# EAGLE board board (EAGLE 6.5.0)
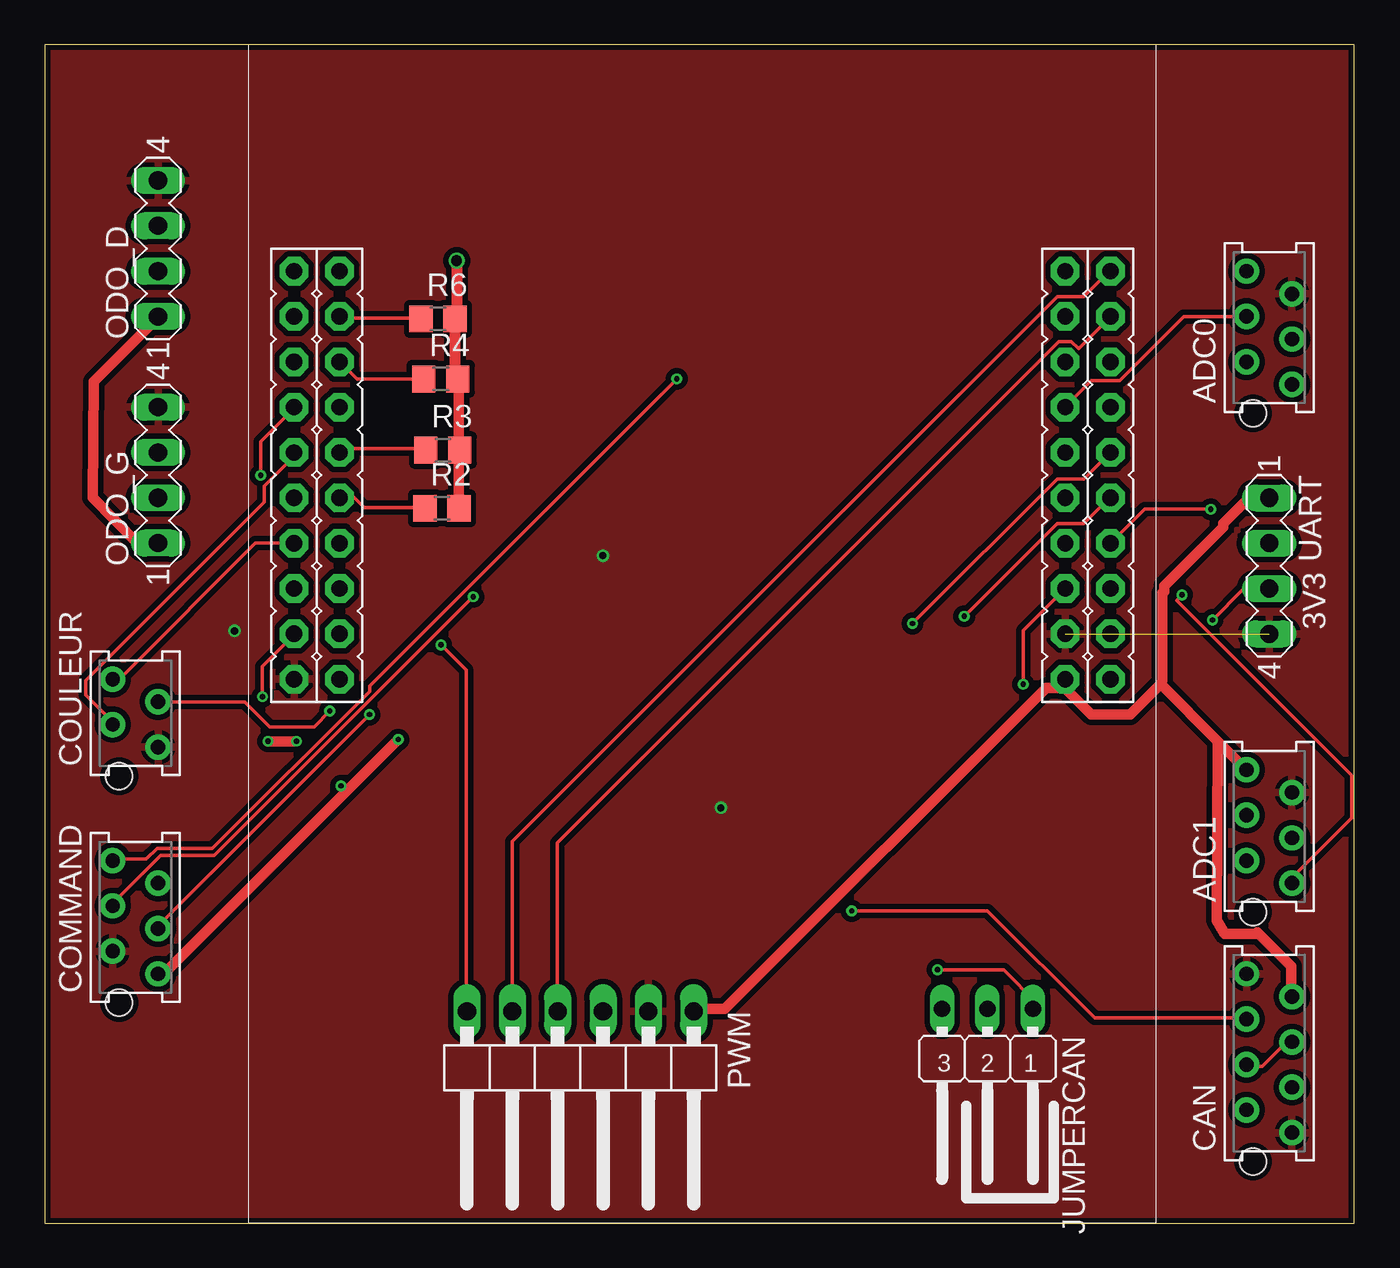
[diagram p0: board, top side]
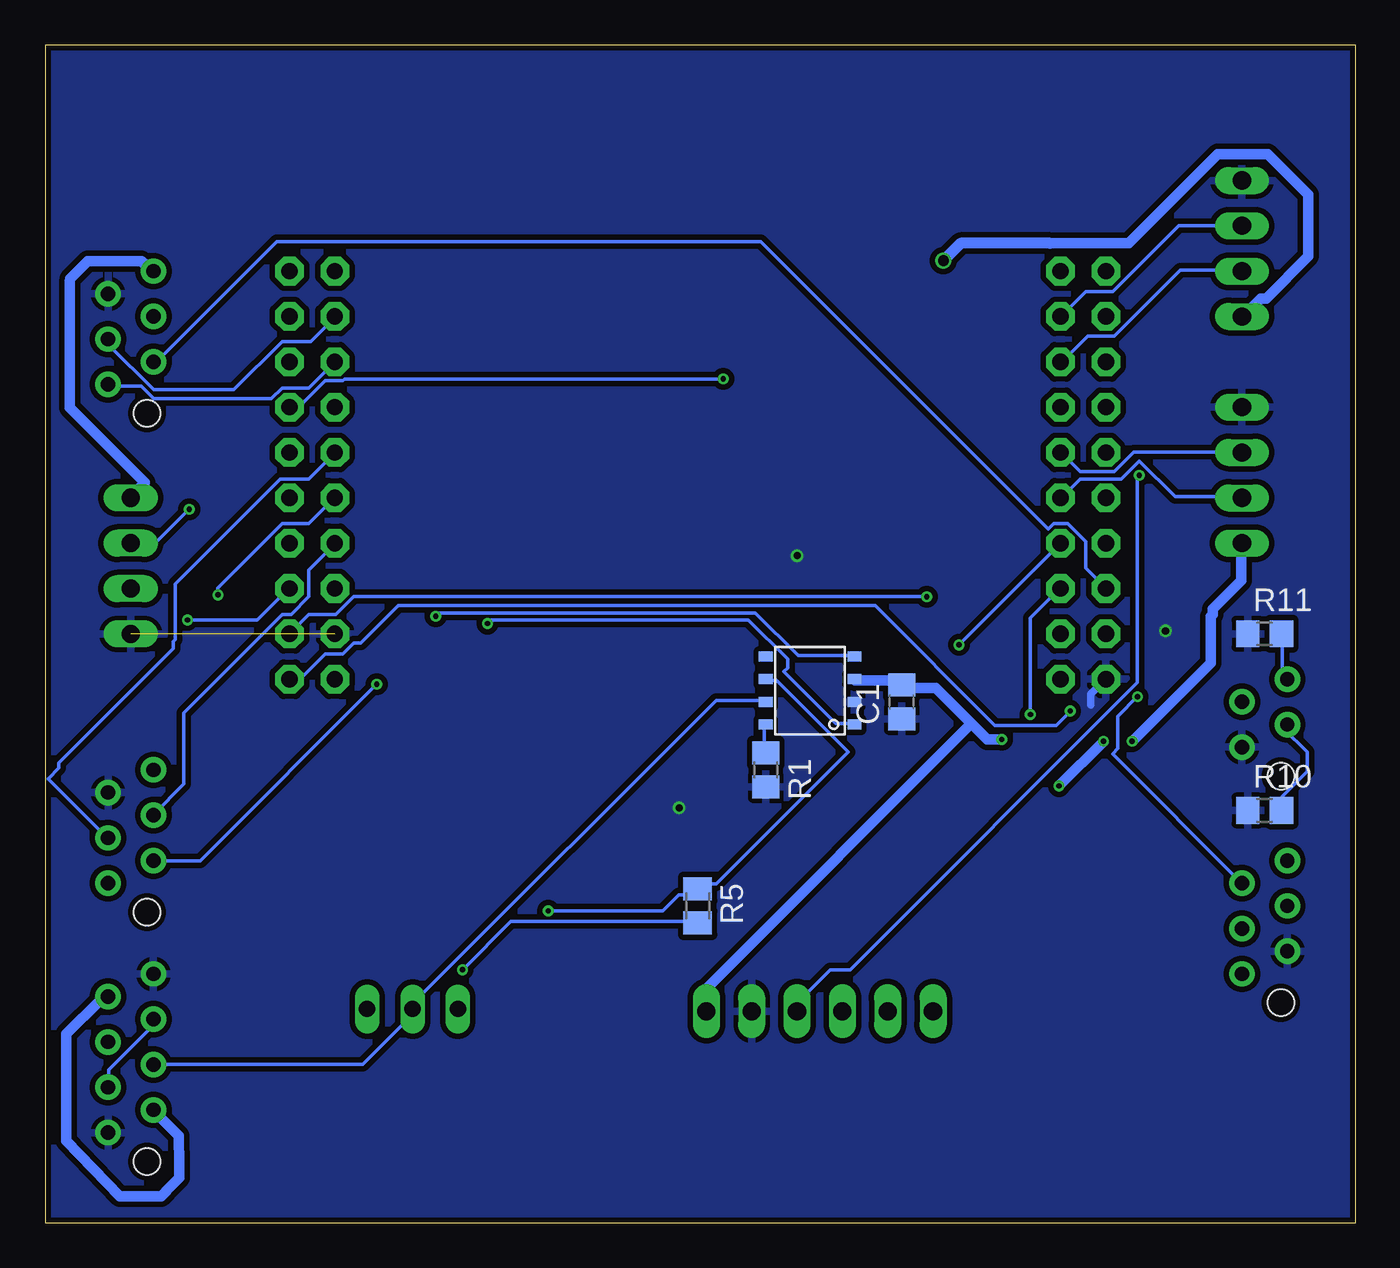
[diagram p1: board, bottom side, seen from below]

Size 73.33 x 66.03 mm. Coordinates in mm from the lower left corner, seen from the top.
Outline: 0,0 73.33,0 73.33,66.03 0,66.03 0,0
Copper layers (1*16): Top 0.035mm / dielectric 1.6mm / Bottom 0.035mm
Design rules "dipole": minimum track width 0.2mm, minimum drill 0.3mm, track to track 0.15mm, track to pad 0.15mm, pad to pad 0.15mm, via to via 0.15mm, smd to smd 0.01mm, copper to edge 0.01mm, drill to drill 0.01mm, minimum pad ring 0.15mm, minimum via ring 0.15mm, stop-mask expansion 1mil, vias tented up to drill 0mil, thermal gap 10mil
Net classes: 1 +5V: width 0.6 mm, drill 0.2 mm, clearance 0.4 mm

## Footprints (pad centres in the part's own frame; a part is rotated, then mirrored left to right if it is on the bottom)
AMP-215079-6 = drill 0.8 pad 1.422: 1 0,0; 2 1.27,2.54; 3 2.54,0; 4 3.81,2.54; 5 5.08,0; 6 6.35,2.54 | hole 1.5: -1.62,2.175
C0805 = smd 1.3 x 1.5: 1 -0.95,0; 2 0.95,0
AMP-215079-8 = drill 0.8 pad 1.422: 1 0,-1.27; 2 1.27,1.27; 3 2.54,-1.27; 4 3.81,1.27; 5 5.08,-1.27; 6 6.35,1.27; 7 7.62,-1.27; 8 8.89,1.27 | hole 1.5: -1.62,0.905
AMP-215079-4 = drill 0.8 pad 1.422: 1 0,0; 2 1.27,2.54; 3 2.54,0; 4 3.81,2.54 | hole 1.5: -1.62,2.175
JP2W = drill 0.914 long: 1 -2.54,-1.27; 2 0,-1.27; 3 2.54,-1.27
MA04-1 = drill 1.016 long: 1 -3.81,0; 2 -1.27,0; 3 1.27,0; 4 3.81,0
1X06/90 = drill 1.016 long: 1 -6.35,-3.81; 2 -3.81,-3.81; 3 -1.27,-3.81; 4 1.27,-3.81; 5 3.81,-3.81; 6 6.35,-3.81
R0805 = smd 1.3 x 1.5: 1 -0.95,0; 2 0.95,0
M0805 = smd 1.3 x 1.6: 1 -0.95,0; 2 0.95,0
LAUNCHPAD-XL = drill 0.914 pad 1.6 octagon: 3.3V 30.48,2.54; GND1 33.02,5.08; GND2 30.48,48.26; PA2 53.34,48.26; PA3 50.8,48.26; PA4 48.26,48.26; PA5 48.26,2.54; PA6 50.8,2.54; PA7 53.34,2.54; PB0 35.56,2.54; PB1 38.1,2.54; PB2 33.02,48.26; PB3 35.56,45.72; PB4 45.72,2.54; PB5 33.02,2.54; PB6 45.72,48.26; PB7 43.18,48.26; PC4 38.1,45.72; PC5 40.64,45.72; PC6 43.18,45.72; PC7 45.72,45.72; PD0 35.56,5.08; PD1 38.1,5.08; PD2 40.64,5.08; PD3 43.18,5.08; PD6 48.26,45.72; PD7 50.8,45.72; PE0 35.56,48.26; PE1 45.72,5.08; PE2 48.26,5.08; PE3 50.8,5.08; PE4 40.64,2.54; PE5 43.18,2.54; PF0 38.1,48.26; PF1 53.34,5.08; PF2 30.48,45.72; PF3 33.02,45.72; PF4 53.34,45.72; RST 40.64,48.26; VBUS 30.48,5.08
SOIC_8 = smd 0.559 x 0.762: P1 0,-4.966; P2 1.27,-4.966; P3 2.54,-4.966; P4 3.81,-4.966; P5 3.81,0; P6 2.54,0; P7 1.27,0; P8 0,0

## Placement (x,y rotation side)
ADC0  MMATCH-6-  [AMP-215079-6]  69.85,46.99 90 top
ADC1  MMATCH-6-  [AMP-215079-6]  69.85,19.05 90 top
C1  100n  [C0805]  25.4,29.21 90 bottom
CAN  [AMP-215079-8]  68.58,5.08 90 top
COMMAND  MMATCH-6-  [AMP-215079-6]  6.35,13.97 90 top
COULEUR  MMATCH-4-  [AMP-215079-4]  6.35,26.67 90 top
JUMPERCAN  [JP2W]  52.8,10.74 180 top
ODO_D  [MA04-1]  6.35,54.61 90 top
ODO_G  [MA04-1]  6.35,41.91 90 top
PWM  [1X06/90]  30,8.07 180 top
R1  21k  [R0805]  33.02,25.4 270 bottom
R2  2,7k  [R0805]  22.25,40.05 0 top
R3  2,7k  [R0805]  22.3,43.31 0 top
R4  2,7k  [R0805]  22.18,47.3 0 top
R5  120  [M0805]  36.83,17.78 270 bottom
R6  2,7k  [R0805]  22.03,50.67 0 top
R10  10k  [R0805]  5.08,23.13 0 bottom
R11  10k  [R0805]  5.08,33.02 0 bottom
TIVA  STELLARIS-LAUNCHPADSTELLARIS-LAUNCHPAD  [LAUNCHPAD-XL]  62.23,0 90 top
U$1  MCP2551  [SOIC_8]  33.02,27.94 90 bottom
UART  [MA04-1]  68.58,36.83 270 top

## Library data of the parts
ADC0 ADC1 CAN COMMAND COULEUR = jt-con-micromatch
C1 R1-R6 R10 R11 = rcl
JUMPERCAN = jumper
ODO_D ODO_G UART = con-lstb; OC_FARNELL: unknown; OC_NEWARK: unknown
PWM = pinhead
TIVA = fabhack
U$1 = microchip

## Nets
+5V [+5V]: ADC0.6 ADC1.6 C1.2 CAN.2 CAN.7 COMMAND.1 ODO_D.1 ODO_G.1 PWM.1 R2.2 R3.2 R4.2 R6.2 TIVA.VBUS U$1.P3 UART.1
ADC_0: ADC0.3 TIVA.PE3
ADC_1: ADC0.1 TIVA.PE2
ADC_2: ADC0.4 TIVA.PE1
ADC_3: ADC0.2 TIVA.PE0
ADC_4: ADC1.3 TIVA.PD3
ADC_5: ADC1.1 TIVA.PD2
ADC_6: ADC1.4 TIVA.PD1
ADC_7: ADC1.2 TIVA.PD0
CAN_RX: TIVA.PE4 U$1.P4
CAN_TX: TIVA.PE5 U$1.P1
CANH: CAN.4 CAN.5 JUMPERCAN.2 U$1.P7
CANL: CAN.3 CAN.6 R5.1 U$1.P6
CHA_D: ODO_D.2 R4.1 TIVA.PD6
CHA_G: ODO_G.2 R2.1 TIVA.PC5
CHB_D: ODO_D.3 R6.1 TIVA.PD7
CHB_G: ODO_G.3 R3.1 TIVA.PC6
COULEUR: COULEUR.4 R11.2 TIVA.PF0
DIR1: COMMAND.3 TIVA.PB3
DIR2: COMMAND.5 TIVA.PB2
GND: ADC0.5 ADC1.5 C1.1 CAN.1 CAN.8 COMMAND.2 COULEUR.1 ODO_D.4 ODO_G.4 PWM.2 R1.2 R10.1 R11.1 TIVA.GND1 TIVA.GND2 U$1.P2 UART.4
N$1: R1.1 U$1.P8
N$9: JUMPERCAN.1 R5.2
PWM1: PWM.3 TIVA.PB6
PWM2: PWM.4 TIVA.PA6
PWM3: PWM.5 TIVA.PA7
PWM4: PWM.6 TIVA.PC4
PWM_MOT1: COMMAND.4 TIVA.PB5
PWM_MOT2: COMMAND.6 TIVA.PB4
RST: TIVA.RST
TIRETTE: COULEUR.2 R10.2 TIVA.PB7
UART_RX: TIVA.PB0 UART.3
UART_TX: TIVA.PB1 UART.2
VDD_3V3: COULEUR.3 TIVA.3.3V

## Tracks (layer width: path | path; a pad name or v marks a point on that pad's centre or on a via)
+5V  (via drill 0.3, 0.6)
  Top 0.6: 62.5,30.2 65.7,27 | 65.7,27 ADC1.6 | 62.5,30.2 60.8,28.5 58.6,28.5 56.9,30.2 57.1,30.4 TIVA.VBUS 56.7,30 56.1,30 38.1,12 36.5,12 36.4,11.9 PWM.1 | 65.7,27 65.65,16.96 66.1,16.2 67.8,16.2 67.9,16.3 69.8,14.4 69.8,12.7 CAN.7 | UART.1 68.5,40.6 67.4,40.6 66,39.2 66,39 62.7,35.7 62.7,35.4 62.6,35.3 62.6,30.4 62.5,30.2 | ODO_G.1 5.2,38.1 2.71,40.65 2.74,47.14 6.4,50.8 ODO_D.1 | v19.8,27.1 16.9,24.2 | 16.9,24.2 6.7,14 6.4,14 COMMAND.1 | v14.1,27 v12.5,27 | v16.6,24.5 16.9,24.2 | R2.2 23.2,43.3 R3.2 23.2,43.6 23.2,47.1 R4.2
  Top 0.61: v23.07,53.93 23.07,50.76 R6.2 22.98,47.45 R4.2
  Bottom 0.6: ADC0.6 67.4,53.4 67.99,53.89 70.9,53.9 71,53.9 71.97,52.93 72,52.74 72,45.7 67.8,41.5 68.6,40.7 UART.1 | CAN.2 67.3,6.3 65.88,4.89 65.87,3.27 65.87,2.54 66.6,1.81 66.6,1.8 66.87,1.51 67.2,1.5 69.2,1.5 72.2,4.62 72.2,10.6 70.3,12.5 70.1,12.5 69.9,12.7 CAN.7 | U$1.P3 28,30.4 25.6,30.4 25.4,30.2 C1.2 25.2,30 23.5,30 21.5,28 | 21.5,28 36.3,13.2 36.3,11.9 PWM.1 | v19.8,27.1 20.6,27.1 21.5,28 | v12.5,27 8.1,31.4 8.1,34 8,34.1 8,34.4 6.4,36 6.4,38.1 ODO_G.1 | v16.6,24.5 v14.1,27 | 17.1,54.9 12.7,54.9 7.7,59.9 4.9,59.9 2.63,57.63 2.63,54.17 5,51.8 5.3,51.8 6.3,50.8 ODO_D.1
  Bottom 0.61: 17.1,54.9 22.1,54.9 v23.07,53.93
ADC_0
  Bottom 0.2: ADC0.3 69.8,49.5 69.8,49.2 67.3,46.7 62.8,46.7 60.1,49.4 58.5,49.4 57.1,50.8 TIVA.PE3
ADC_1
  Bottom 0.2: ADC0.1 69.8,46.9 68,46.9 67.3,46.2 60.7,46.2 60.1,46.8 58.6,46.8 57.2,48.2 TIVA.PE2
ADC_2
  Top 0.2: ADC0.4 63.8,50.8 60.2,47.2 58.6,47.2 57.2,45.8 TIVA.PE1
ADC_3
  Bottom 0.2: ADC0.2 67.3,48.3 67.1,48.3 60.4,55 33.3,55 17.2,38.9 16.9,39.2 16.1,39.2 15.1,38.2 15.1,36.7 14,35.6 TIVA.PE0
ADC_4
  Bottom 0.2: ADC1.3 69.9,21.6 73.2,24.9 72.6,25.5 72.6,25.8 66.2,32.2 66.2,32.6 66.1,32.7 66.1,35.8 60.2,41.7 58.6,41.7 57.2,43.1 TIVA.PD3
ADC_5  (via drill 0.3)
  Top 0.2: v63.7,35.2 63.4,34.9 73.2,25.1 73.2,22.7 69.9,19.4 69.9,19.1 ADC1.1
  Bottom 0.2: v63.7,35.2 63.7,35.6 60.1,39.2 58.6,39.2 57.2,40.6 TIVA.PD2
ADC_6
  Bottom 0.2: ADC1.4 67.3,22.9 65.6,24.6 65.6,28.6 60.1,34.1 59.6,34.1 58.6,35.1 58.6,36.6 57.1,38.1 TIVA.PD1
ADC_7  (via drill 0.3)
  Top 0.2: v54.8,30.2 54.8,33.2 57.1,35.5 TIVA.PD0
  Bottom 0.2: v54.8,30.2 64.7,20.3 67.3,20.3 ADC1.2
CAN_RX  (via drill 0.3)
  Top 0.2: v51.5,34 56.7,39.2 58.2,39.2 59.6,40.6 TIVA.PE4
  Bottom 0.2: v51.5,34 51.3,34.2 33.6,34.2 31.2,31.8 28.1,31.8 U$1.P4
CAN_TX  (via drill 0.3)
  Top 0.2: v48.6,33.6 56.7,41.7 58.2,41.7 59.6,43.1 TIVA.PE5
  Bottom 0.2: v48.6,33.6 48.4,33.8 34,33.8 31.8,31.6 31.8,31.1 32,30.9 29.1,28 28.1,28 U$1.P1
CANH
  Top 0.2: CAN.4 67.4,8.8 68.2,8.8 69.3,9.9 69.6,9.9 69.8,10.1 CAN.5
  Bottom 0.2: U$1.P7 33.1,29.3 35.8,29.3 52.3,12.8 52.3,12.6 52.8,12.1 JUMPERCAN.2 53.3,11.5 53.3,11.2 55.6,8.9 CAN.4
CANL  (via drill 0.3)
  Top 0.2: v45.2,17.5 52.8,17.5 58.8,11.5 67.3,11.5 CAN.6
  Bottom 0.2: CAN.3 69.8,7.7 69.8,8.6 67.6,10.8 67.6,11.2 67.4,11.4 CAN.6 | U$1.P6 33,30.4 32.4,30.4 28.4,26.4 35.8,19 36.6,19 36.8,18.8 R5.1 36.9,18.7 37.2,18.4 37.9,18.4 38.8,17.5 v45.2,17.5
CHA_D
  Top 0.2: R4.1 17.5,47.3 16.6,48.2 TIVA.PD6
  Bottom 0.2: ODO_D.2 6.4,53.4 9.8,53.4 13.5,49.7 15,49.7 16.5,48.2 TIVA.PD6
CHA_G
  Top 0.2: R2.1 21.3,40.1 17.9,40.1 17,41 16.6,40.6 TIVA.PC5
  Bottom 0.2: ODO_G.2 6.4,40.7 10.1,40.7 12.1,42.7 13.1,41.7 15.4,41.7 16.5,40.6 TIVA.PC5
CHB_D
  Top 0.2: R6.1 21,50.7 16.7,50.7 16.6,50.8 TIVA.PD7
  Bottom 0.2: ODO_D.3 6.4,55.9 9.9,55.9 13.6,52.2 15.1,52.2 TIVA.PD7
CHB_G
  Top 0.2: R3.1 21.3,43.4 16.8,43.4 16.6,43.2 TIVA.PC6
  Bottom 0.2: ODO_G.3 6.4,43.2 12.4,43.2 13.5,42.1 15.4,42.1 16.5,43.2 TIVA.PC6
COULEUR
  Top 0.2: TIVA.PF0 11.8,38.1 4.4,30.7 4.1,30.7 3.9,30.5 COULEUR.4
  Bottom 0.2: R11.2 4.1,33 4.1,30.7 3.9,30.5 COULEUR.4
DIR1  (via drill 0.3)
  Top 0.2: v18.2,28.5 6.4,16.7 6.4,16.6 COMMAND.3
  Bottom 0.2: v18.2,28.5 18.2,33.9 16.6,35.5 TIVA.PB3
DIR2  (via drill 0.3)
  Top 0.2: v12.2,29.5 12.2,31.2 14,33 TIVA.PB2
  Bottom 0.2: COMMAND.5 13.6,26.3 13.3,26.6 13.3,28.4 v12.2,29.5
GND  (via drill 0.4)  (1 unrouted)
  Bottom 0.406: TIVA.GND2 14.81,29.64 14.81,29.04
  other vias: 31.26,37.4 37.87,23.27 10.63,33.18
  pour Bottom (isolate 0.305): 0,66.04 73.66,66.04 73.66,0 0,0
  pour Top (isolate 0.305): 0,66.04 73.66,66.04 73.66,0 0,0
N$1
  Bottom 0.2: U$1.P8 33.1,27.9 33.1,26.4 R1.1
N$9  (via drill 0.3)
  Top 0.2: v50,14.2 53.7,14.2 55.6,12.3 55.4,12.1 JUMPERCAN.1
  Bottom 0.2: v50,14.2 47.3,16.9 36.9,16.9 R5.2
PWM1  (via drill 0.3)
  Top 0.2: v12.1,41.9 12.1,43.8 14,45.7 TIVA.PB6
  Bottom 0.2: v12.1,41.9 12.2,41.8 12.2,30.3 28.3,14.2 29.4,14.2 31.2,12.4 31.2,11.9 PWM.3
PWM2
  Top 0.2: PWM.4 28.7,11.9 28.7,21.3 56.8,49.4 57.5,49.4 57.9,49 TIVA.PA6
PWM3
  Top 0.2: PWM.5 26.2,11.9 26.2,21.4 56.7,51.9 58.2,51.9 59.6,53.3 TIVA.PA7
PWM4  (via drill 0.3)
  Top 0.2: v22.2,32.4 23.6,31 23.6,11.9 PWM.6
  Bottom 0.2: v22.2,32.4 TIVA.PC4
PWM_MOT1  (via drill 0.3)
  Top 0.2: v24,35.1 9.5,20.6 6.5,20.6 3.9,18 3.9,17.8 COMMAND.4
  Bottom 0.2: v24,35.1 56.1,35.1 57.1,34.1 58.6,34.1 59.6,33.1 TIVA.PB5
PWM_MOT2  (via drill 0.3)
  Top 0.2: v35.4,47.3 18.2,30.1 18.2,29.8 9.4,21 6.3,21 5.7,20.4 3.9,20.4 COMMAND.6
  Bottom 0.2: v35.4,47.3 56.6,47.3 56.7,47.2 57.7,47.2 58.9,46 59.4,46 59.6,45.8 TIVA.PB4
TIRETTE
  Top 0.2: TIVA.PB7 13.9,43.1 13.9,42.9 12.3,41.3 12.3,40.4 2.3,30.4 2.3,29.6 3.9,28 COULEUR.2
  Bottom 0.2: R10.2 4.1,23.2 4.1,23.9 2.7,25.3 2.7,26.4 4,27.7 3.8,27.9 COULEUR.2
UART_RX  (via drill 0.3)
  Top 0.2: v65.4,33.8 67.1,35.5 68.5,35.5 UART.3
  Bottom 0.2: v65.4,33.8 61.5,33.8 59.7,35.6 TIVA.PB0
UART_TX  (via drill 0.3)
  Top 0.2: v65.3,40 61.6,40 TIVA.PB1
  Bottom 0.2: UART.2 67.2,38.1 v65.3,40
VDD_3V3  (via drill 0.3)
  Top 0.2: v15.97,28.7 15.11,27.8 12.6,27.8 11.2,29.2 6.4,29.2 COULEUR.3
  Bottom 0.2: v15.97,28.7 15.97,28.68 16.75,27.9 20.2,27.9 26.9,34.6 53.6,34.6 55.7,32.5 56.1,32.5 56.7,31.9 57.7,31.9 58.9,30.7 59.4,30.7 59.6,30.5 TIVA.3.3V

## Text on the board
tPlace: 3V3